# Altium PCB Copy of PCB_smart_home.PcbDoc
Units mil, origin at the board's own origin, x right, y up, seen from the top; angles counter-clockwise.
Board outline 3260 x 1750 mil, 2 copper layers (Top Layer, Bottom Layer); 23 components, 27 nets, 129 pads, 18 vias.
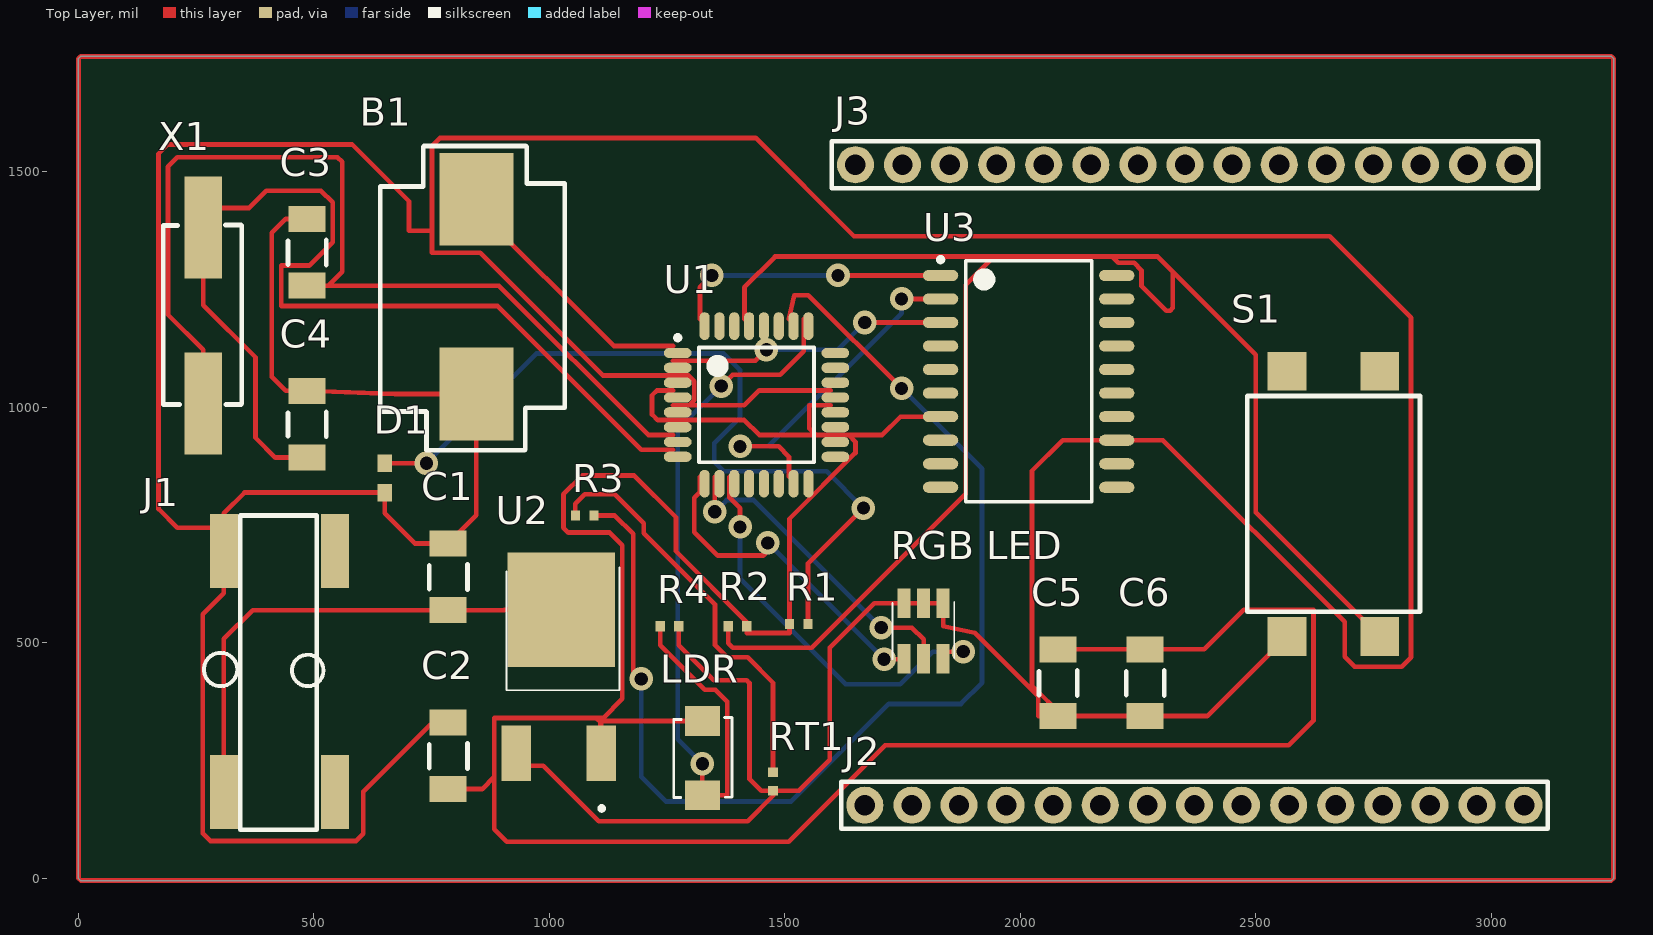
[diagram p0: Top Layer view]
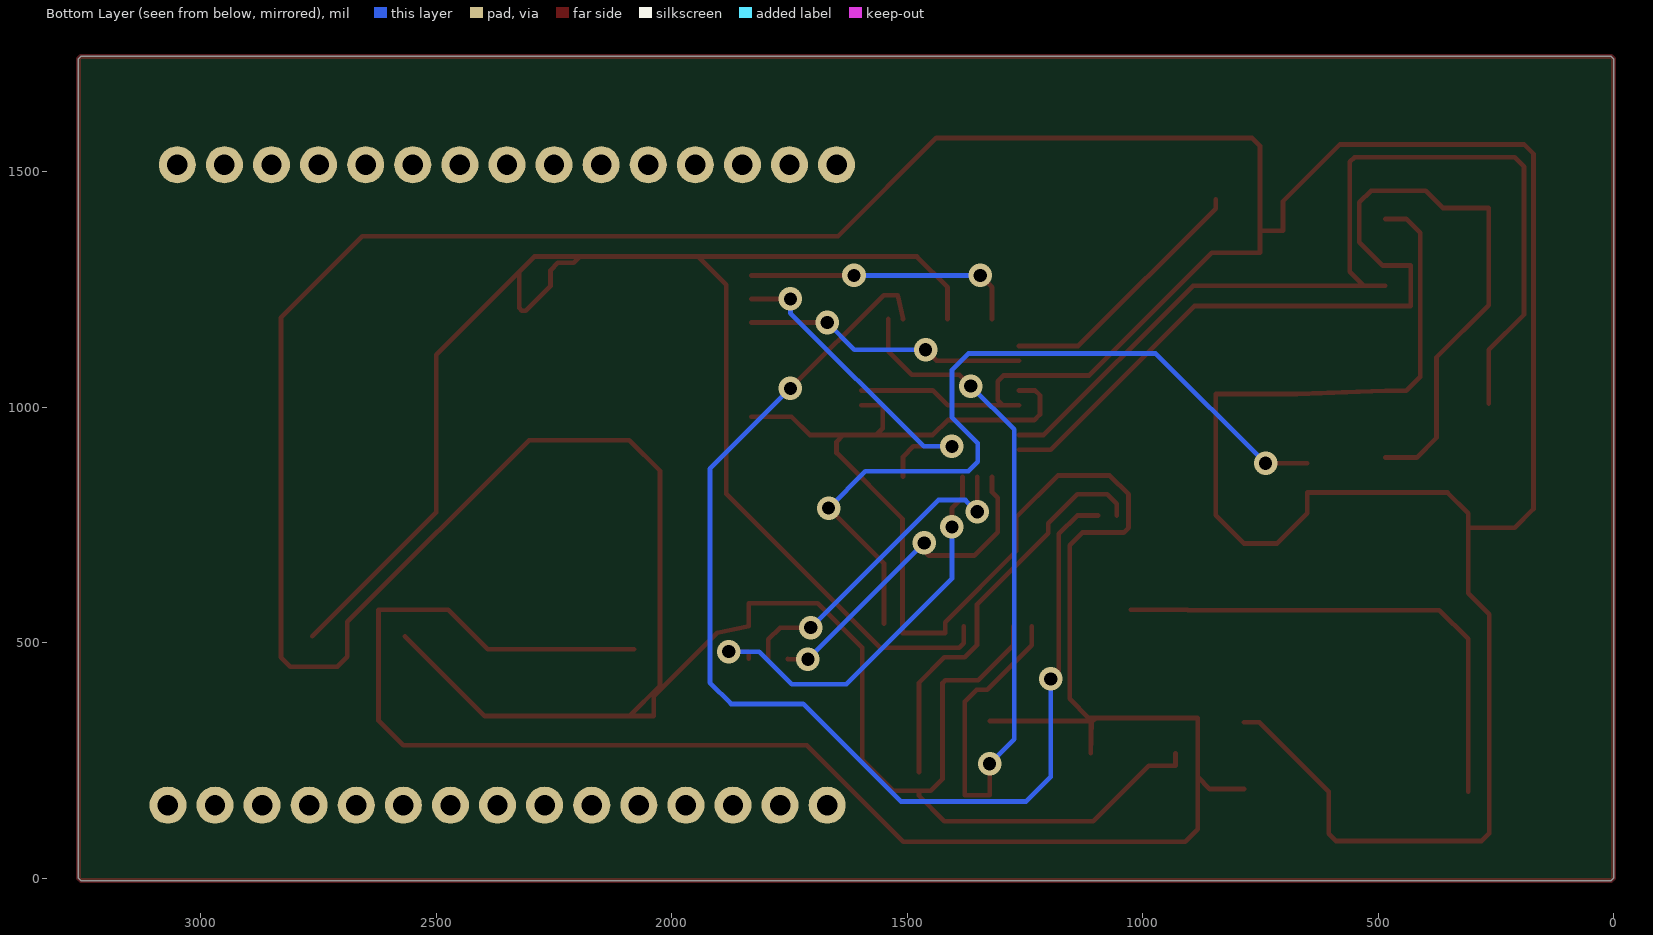
[diagram p1: Bottom Layer view, seen from below]

## Layer stack, top to bottom
Top Solder: solder mask 0.4, Solder Resist, Dk 3.5
Top Layer: signal copper 1.4
Dielectric 1: dielectric 12.6, FR-4, Dk 4.8
Bottom Layer: signal copper 1.4
Bottom Solder: solder mask 0.4, Solder Resist, Dk 3.5

## Board outline
0,0 5,-5 3255,-5 3260,0 3260,1740 3255,1745 5,1745 0,1740

## Design rules (kind name [scope] priority, off if disabled: settings)
Clearance [All] p1: gap=10 ignorepadtopadclearanceinfootprint=FALSE
PolygonConnect [All] p1: connectstyle=Relief reliefconductorwidth=10 reliefentries=4 polygonreliefangle="90 Angle" airgapwidth=10
RoutingVias [All] p1: holewidth=28 width=50 viastyle="Through Hole" minholewidth=28 minwidth=50 maxholewidth=28 maxwidth=50
SolderMaskExpansion [All] p1: expansion=4 istentingtop=FALSE
SupplyNets "Schematic Supply Nets_2" [InNet('+12')] p1: voltage=0.000
SupplyNets "Schematic Supply Nets_1" [InNet('GND')] p2: voltage=0.000
SupplyNets "Schematic Supply Nets" [InNet('+5')] p3: voltage=0.000
Width [All] p1: maxlimit=10 minlimit=10 preferedwidth=10
30 further rules are at their usual default settings.

## Components (designator, comment, footprint, x,y, rotation, side; value= is the part's Value field where it differs from the comment)
B1 "CMT-1271-88-SMT-TR" PCBComponent_1#1 845,1235 r0 top
C1 "0.33uF" PCBComponent_1#2 785,640 r90 top
C2 "0.1uF" PCBComponent_1#2 785,260 r90 top
C3 "22PF" PCBComponent_1#2 485,1329.13 r90 top
C4 "22PF" PCBComponent_1#2 485,964.13 r90 top
C5 "100nF" PCBComponent_1#2 2080,415 r90 top
C6 "100nF" PCBComponent_1#2 2265,415 r90 top
D1 "RED" PCBComponent_1#3 647.6,844.44 r180 top
J1 "PJ-002AH-SMT-TR" PCBComponent_1#4 426.89,439.09 r90 top
J2 "TSM-108-01-L-SV" Header 3070,155 r180 top
J3 "TSM-108-01-L-SV" Header 3050,1515 r180 top
LDR "RS1G" PCBComponent_1#5 1325,255 r0 top
R1 "330 Ω" RESC1005X04N 1529.68,540 r0 top
R2 "1K" RESC1005X04N 1399.68,535 r0 top
R3 "resistor SMD" RESC1005X04N 1075,770 r0 top
R4 "10k" RESC1005X04N 1255,535 r0 top
"RGB LED" "ASMB-TTF2-0B20B" PCBComponent_1#6 1795,525 r90 top
RT1 "10K" RESC1005X04N 1475,205.31 r90 top
S1 "TS16-1212-85-BK-100-SMT-TR" PCBComponent_1#7 2665,795 r90 top
U1 "ATMEGA8A-AU_C16190" TQFP80P900X900X120-32N 1440,1005 r0 top
U2 "MC78M05ACDTRKG" PCBComponent_1#8 1025,570 r270 top
U3 "Driver L293D" SOIC127P1030X265-20N 2017.99,1055 r0 top
X1 "16 MHZ" PCBComponent_1#9 265,1195 r90 top

## Footprints (in the part's own frame and the unit in brackets; to place one, negate y for a bottom-side part, rotate by r counter-clockwise, add the part's x,y. Pads: shape width x height; smd on the part's side, far side on the other; paste and mask are expansions set on the pad)
Header [mm] "SIL Header"
  round 2 hole 1.1: 1(0,0) 2(2.54,0) 3(5.08,0) 4(7.62,0) 5(10.16,0) 6(12.7,0) 7(15.24,0) 8(17.78,0) 9(20.32,0) 10(22.86,0) 11(25.4,0) 12(27.94,0) 13(30.48,0) 14(33.02,0) 15(35.56,0)
  silkscreen extent -1.27,-1.27 36.83,1.27, body extent -1.33,-1.35 36.93,1.35, height 8.6
PCBComponent_1#1 [mm]
  rect 4x5 smd: 1(0,5.25) 2(0,-5.25)
  silkscreen extent -5.18,-8.28 4.78,8.13, body extent -6.55,-6.82 6.25,7.08, height 7.15
PCBComponent_1#2 [mm]
  rect 1.4x2 smd: 1(-1.8,0) 2(1.8,0)
  silkscreen extent -0.69,-1.04 0.66,1.02, body extent -1.65,-1 1.55,0.8, height 1.6
PCBComponent_1#3 [mm]
  rect 0.79x0.94 smd: 1(-0.066,-0.931) 2(-0.066,0.649)
  body extent -0.43,-0.97 0.37,0.63, height 0.8
PCBComponent_1#4 [mm]
  rect 4x1.5 smd: 1(-6.5,3) 2(6.5,3) 3(6.5,-3) 4(-6.5,-3)
  silkscreen extent -8.53,-2.37 8.41,4.07, body extent -6.05,-6.93 6.55,7.97, height 11.01
PCBComponent_1#5 [mm]
  rect 1.9x1.6 smd: 1(0,2) 2(0,-2)
  silkscreen extent -1.55,-2.13 1.6,2.18, body extent -1.38,-2.54 1.18,2.6, height 2.58
PCBComponent_1#6 [mm]
  rect 1.6x0.7 smd: 1(-1.5,1.05) 2(1.5,1.05) 3(-1.5,0) 4(1.5,0) 5(-1.5,-1.05) 6(1.5,-1.05)
  silkscreen extent -1.52,-1.65 1.57,1.68, body extent -1.85,-1.72 1.85,1.78, height 2.8
PCBComponent_1#7 [mm]
  rect 2.1x2.1 smd: 1(-7.15,2.5) 2(-7.15,-2.5) 3(7.15,2.5) 4(7.15,-2.5)
  silkscreen extent -5.82,-4.67 5.82,4.65, body extent -7.6,-6.23 7.6,5.77, height 8.8
PCBComponent_1#8 [mm]
  rect 6.2x5.8 smd: 1(0,0)
  rect 3x1.6 smd: 2(7.747,2.159) 3(7.747,-2.411)
  silkscreen extent -2.29,-2.95 10.82,3.15, body extent -1.85,-3.3 8.05,3.2, height 2.59
PCBComponent_1#9 [mm]
  rect 5.5x2 smd: 1(-4.75,0) 2(4.75,0)
  silkscreen extent -4.8,-2.08 4.88,2.16, body extent -6.55,-2.33 6.65,2.47, height 4.31
RESC1005X04N [mm] "Chip Resistor, 2-Leads, Body 1.00x0.50mm, IPC Medium Density"
  rect 0.5x0.55 smd: 1(-0.5,0) 2(0.5,0)
  body extent -0.53,-0.28 0.53,0.28, height 0.4
SOIC127P1030X265-20N [mm] "SOIC, 20-Leads, Body 12.80x7.50mm, Pitch 1.27mm, IPC Medium Density"
  oval 1.9x0.6 smd: 1(-4.75,5.715) 2(-4.75,4.445) 3(-4.75,3.175) 4(-4.75,1.905) 5(-4.75,0.635) 6(-4.75,-0.635) 7(-4.75,-1.905) 8(-4.75,-3.175) 9(-4.75,-4.445) 10(-4.75,-5.715) 11(4.75,-5.715) 12(4.75,-4.445) 13(4.75,-3.175) 14(4.75,-1.905) 15(4.75,-0.635) 16(4.75,0.635) 17(4.75,1.905) 18(4.75,3.175) 19(4.75,4.445) 20(4.75,5.715)
  silkscreen extent -4.87,-6.5 3.4,6.69, body extent -5.16,-6.5 5.16,6.5, height 2.65
TQFP80P900X900X120-32N [mm] "TQFP, 32-Leads, Body 7.00x7.00mm, Pitch 0.80mm, IPC Medium Density"
  oval 1.5x0.55 smd: 1(-4.25,2.8) 2(-4.25,2) 3(-4.25,1.2) 4(-4.25,0.4) 5(-4.25,-0.4) 6(-4.25,-1.2) 7(-4.25,-2) 8(-4.25,-2.8) 17(4.25,-2.8) 18(4.25,-2) 19(4.25,-1.2) 20(4.25,-0.4) 21(4.25,0.4) 22(4.25,1.2) 23(4.25,2) 24(4.25,2.8)
  oval 0.55x1.5 smd: 9(-2.8,-4.25) 10(-2,-4.25) 11(-1.2,-4.25) 12(-0.4,-4.25) 13(0.4,-4.25) 14(1.2,-4.25) 15(2,-4.25) 16(2.8,-4.25) 25(2.8,4.25) 26(2,4.25) 27(1.2,4.25) 28(0.4,4.25) 29(-0.4,4.25) 30(-1.2,4.25) 31(-2,4.25) 32(-2.8,4.25)
  silkscreen extent -4.37,-3.1 3.1,3.75, body extent -4.5,-4.5 4.5,4.5, height 1.2

## Part data
B1: library part buzzer, "88dB Passive (external drive) Electromagnetic Type 2.4kHz Buzzers ROHS", manufactor=CUI, supplier part number=C3811771, ComponentLink1Description="snapeda link", ComponentLink1URL=https://www.snapeda.com/parts/CMT-1271-88-SMT-TR/CUI%20Devices/view-part/?ref=search&t=Buzzer%20smd, ComponentLink2Description=datasheet, ComponentLink2URL=https://www.snapeda.com/parts/CMT-1271-88-SMT-TR/CUI%20Devices/datasheet/, manufactor part number=CMT-1271-88-SMT-TR, supplier=LCSC
C1 C2 C3 C4 C5 C6: library part "capacitor_1206 CODE", "100V 100nF C0G ±5% 1206 Multilayer Ceramic Capacitors MLCC - SMD/SMT ROHS", manufactor="Murata Electronics", manufactor part number=GRM31C5C2A104JA01L, supplier part number=C405303, ComponentLink1Description="snapeda link", ComponentLink1URL=https://www.snapeda.com/parts/GRM31C5C2A104JA01L/Murata/view-part/?ref=search&t=1206%20cap%20smd, ComponentLink2Description=Datasheet, ComponentLink2URL=https://www.snapeda.com/parts/GRM31C5C2A104JA01L/Murata/datasheet/, supplier=LCSC
D1: library part LED, "Red,Emerald SMD,1.6x1.9mm LED Indication - Discrete ROHS", Manufacturer="Everlight Elec", Manufacturer part number=19-22/R6GHC-A32/2T, supplier part number=C131262, ComponentLink1Description=Datasheet, ComponentLink1URL=https://www.lcsc.com/datasheet/lcsc_datasheet_1811141149_Everlight-Elec-19-22-R6GHC-A32-2T_C131262.pdf, supplier=LCSC
J1: library part "DC connector", "SMD DC Power Connectors ROHS", Manufacturer=CUI, package=SMD, supplier part number=C22434687, ComponentLink1Description="snapeda link", ComponentLink1URL=https://www.snapeda.com/parts/PJ-002AH-SMT-TR/CUI%20Devices/view-part/?ref=search&t=DC%20connector%20SMD, ComponentLink2Description=datasheet, ComponentLink2URL=https://www.snapeda.com/parts/PJ-002AH-SMT-TR/CUI%20Devices/datasheet/, Manufacturer part number=PJ-002AH-SMT-TR, supplier=LCSC
J2 J3: package=None, Availability=Unavailable, MF=Samtec, MP=TSM-108-01-L-SV, Price=None
LDR: library part "LDR sensor", "1A Independent Type 1.3V@1A 400V SMA(DO-214AC) Diodes - General Purpose ROHS", manufactor="SMC(Sangdest Microelectronicstronic (Nanjing))", ComponentLink1Description=snapeda, ComponentLink1URL=https://www.snapeda.com/parts/RS1G/Taiwan%20Semiconductor/view-part/?ref=search&t=LDR%20sensor%20smd, ComponentLink2Description=datasheet, ComponentLink2URL=https://www.snapeda.com/parts/RS1G/Taiwan%20Semiconductor/datasheet/, manufactor part time=RS1G, supplier=LCSC, supplier part time=C260336
R1 R2 R3 R4: library part Resistor, "500mW Thick Film Resistors 400V ±100ppm/℃ ±1% 100Ω 1210 Chip Resistor - Surface Mount ROHS", Manufacturer=PANASONIC, Manufacturer part number=ERJ-U14F1000U, supplier part number=C1014086, ComponentLink1Description=Datasheet, ComponentLink1URL=https://www.lcsc.com/datasheet/lcsc_datasheet_2201131530_PANASONIC-ERJ-U14F1000U_C1014086.pdf, supplier=Lcsc
"RGB LED": library part "RGB LED", "PLCC-6 RGB LEDs ROHS", manufactor="Broadcom Limited", supplier part number=C6126294, ComponentLink1Description="snapeda link", ComponentLink1URL=https://www.snapeda.com/parts/ASMB-TTF2-0B20B/Broadcom%20%2F%20Avago/view-part/?ref=search&t=RGB%20led%20smd, ComponentLink2Description=datasheet, ComponentLink2URL=https://www.snapeda.com/parts/ASMB-TTF2-0B20B/Avago%20Technologies/datasheet/, ComponentLink3Description="LCSC link", ComponentLink3URL=https://www.lcsc.com/product-detail/RGB-LEDs_Broadcom-Limited-ASMB-TTF2-0B20B_C6126294.html, manufactor part number=ASMB-TTF2-0B20B, supplier=LCSC
RT1: library part "NTC temperature sensor", "10kΩ ±0.5% 3380K ±0.7% 0402 NTC Thermistors ROHS / Recommended For You", Manufacturer="Murata Electronics", Manufacturer part number=NCU15XH103D6SRC, supplier part number=C17294780, ComponentLink1Description=datasheet, ComponentLink1URL=https://www.lcsc.com/datasheet/lcsc_datasheet_2401291008_Murata-Electronics-NCU15XH103D6SRC_C17294780.pdf, supplier=lcsc
S1: library part switch, "50mA Standing paste SPST - normally open 100gf 12V Tactile Switches ROHS", manufactor=CUI, supplier part number=C6338790, ComponentLink1Description=snapeda, ComponentLink1URL=https://www.snapeda.com/parts/TS16-1212-85-BK-100-SMT-TR/CUI%20Devices/view-part/?ref=search&t=switch%20smd, ComponentLink2Description=datasheet, ComponentLink2URL=https://www.snapeda.com/parts/TS16-1212-85-BK-100-SMT-TR/CUI%20Devices/datasheet/, manufactor part time=TS16-1212-85-BK-100-SMT-TR, supplier=LCSC
U1: library part ATMEGA8A-AU, "8KB 1KB FLASH 23 2.7V~5.5V AVR 16MHz TQFP-32(7x7) Microcontrollers (MCU/MPU/SOC) ROHS", Manufacturer="Microchip Tech", supplier part number=C16190, ComponentLink1Description=Datasheet, ComponentLink1URL=https://www.lcsc.com/datasheet/lcsc_datasheet_1810161120_Microchip-Tech-ATMEGA8A-AU_C16190.pdf, Manufacturer part number=ATMEGA8A-AU, supplier=LCSC
U2: library part regulator, "500mA 80dB@(120Hz) Fixed 5V Positive electrode 35V TO-252-2(DPAK) Voltage Regulators - Linear, Low Drop Out (LDO) Regulators ROHS", Manufacturer=onsemi, supplier part number=C232660, ComponentLink1Description="snapeda link", ComponentLink1URL=https://www.snapeda.com/parts/MC78M05ACDTRKG/onsemi/view-part/?ref=search&t=regulator%205v%20smd, ComponentLink2Description=Datasheet, ComponentLink2URL=https://www.snapeda.com/parts/MC78M05ACDTRKG/onsemi/datasheet/, ComponentLink3Description="LCSC link", ComponentLink3URL=https://www.lcsc.com/product-detail/Voltage-Regulators-Linear-Low-Drop-Out-LDO-Regulators_onsemi-MC78M05ACDTRKG_C232660.html, Manufacturer part number=MC78M05ACDTRKG, supplier=LCSC
U3: "SOIC-20-300mil Stepper Motor Driver ROHS", Manufacturer=STMicroelectronics, Manufacturer part number=L293DD013TR, supplier part number=C21610, ComponentLink1Description=datasheet, ComponentLink1URL=https://www.lcsc.com/datasheet/lcsc_datasheet_2304140030_STMicroelectronics-L293DD013TR_C21610.pdf, supplier=LCSC
X1: library part crystal, "16MHz ±30ppm ±50ppm HC-49S-SMD Crystals ROHS", ComponentLink1Description="snapeda link", ComponentLink1URL=https://www.snapeda.com/parts/ECS-160-S-5P-TR/ECS%20International/view-part/?ref=search&t=16MHZ%20crystl, ComponentLink2Description=datasheet, ComponentLink2URL=https://www.lcsc.com/datasheet/lcsc_datasheet_2211020230_ECS-ECS-160-S-5P-TR_C2450888.pdf, ComponentLink3Description="LCSC link", ComponentLink3URL=https://www.lcsc.com/product-detail/Crystals_span-style-background-color-ff0-ECS-span-ECS-160-S-5P-TR_C2450888.html

## Via types
v1: diameter 50, hole 28, Top Layer to Bottom Layer, 18 vias

## Nets (pads, with @x,y where several pads share a name; then routed paths per layer and width w, separated by ;. In a path a pad name is that pad's centre, name@x,y a point inside that pad or via, vN(x,y) a via of type N, cw(c..) or ccw(c..) an arc to the next point about the centre after c; other vN are vias at no path point)
+5: C2.1 C5.2 C6.2 LDR.1 R1.1 R2.2 U1.4 U1.6 U1.18 U1.20 U2.2 U3.7 | length 6231.6
  Top Layer w10: C2.1 857.13,189.13 883,215 ; 1262.68,1035.75 1228.75,1035.75 1218,1025 1218,984.76 1230,972.76 1262.68,972.76 1414,972.76 1445.5,941.26 1565.74,941.26 ; LDR.1 1110,333.74 1108.13,331.87 ; 1597.32,1004.25 1552,1004.25 1552,955 1565.74,941.26 ; U3.7 1745.74,980 1707,941.26 1635.74,941.26 ; C5.2 C6.2 2391,485.87 2475.13,570 2623,570 2623,335 2570,282 1713,282 1508,77 910,77 883,104 883,215 ; 883,215 883,340 1100,340 ; 1100,340 1114,340 1155,381 1155,707 1128,734 1040,734 1030,744 1030,815 1070,855 1180,855 1269,766 1269,694 1419.37,543.63 R2.2 1419.37,520.49 1510,520.49 R1.1 1510,763 1650,903 1650,927 1635.74,941.26 ; 1100,340 1108.13,331.87 ; 1108.13,331.87 1110,330 U2.2 1108.13,331.87 ; 1565.74,941.26 1597.32,941.26 1635.74,941.26
+12: U3.6
BLUE: "RGB LED.5" U1.11 | length 878.9
  Top Layer w10: U1.11@1382.76,852.68 1382.76,808 1405,785.76 v1(1405,746) ; 1836.34,465.94 1836.34,481 v1(1879,481)
  Bottom Layer w10: v1(1405,746) 1405,636.09 1629.09,412 1745,412 1814,481 v1(1879,481)
BUZZER: B1.1 U1.1 | length 558.2
  Top Layer w10: B1.1 845,1422 1136.76,1130.24 1262.68,1130.24
EN1: U1.15 U3.2 | length 728.4
  Top Layer w10: v1(1405,917) 1486.74,917 1508.74,895 U1.15@1508.74,852.68 ; v1(1748,1230) U3.2
  Bottom Layer w10: v1(1405,917) 1465,917 1748,1200 v1(1748,1230)
GND: "RGB LED.2" "RGB LED.4" "RGB LED.6" B1.2 C1.2 C2.2 C3.2 C4.2 C5.1 C6.1 D1.2 J1.2 R4.2 RT1.1 S1.1 U1.3 U1.5 U1.21 U2.3 U3.13 | length 13391.8
  Top Layer w10: C3.2 440,1400 410.63,1370.63 410.63,1064.37 440,1035 C4.2 671.69,1028.31 B1.2 845,770.87 C1.2 714.33,710.87 650.19,775 D1.2 352.66,818.88 308.78,775 J1.2@308.78,744 ; C2.2 752,330.87 605,183.87 605,94 590,79 280,79 264,95 264,560.22 308.78,605 J1.2 J1.2@308.78,744 ; U2.3 930.08,239 987,239 1105,121 1421,121 1475,175 RT1.1 ; 1262.68,1004.25 1297.25,1004.25 ; R4.2 1274.69,495 1349.45,420.24 1419.08,420.24 1425,414.32 1425,210.63 1450,185.63 RT1.1 ; 1597.32,1035.75 1445.5,1035.75 1414,1004.25 1297.25,1004.25 ; S1.1 2397.21,344.13 C6.1 2172,344.13 C5.1@2090,344.13 ; J1.2@308.78,744 210,744 170,784 170,1538 190,1558 581,1558 702,1437 702,1375 751,1375 ; 751,1375 751,1555 768,1572 1438,1572 1647,1363 2657,1363 2830,1190 2830,469 2810,449 2710,449 2689,470 2689,544 2303,930 U3.13 2090,930 2025,865 2025,409.13 C5.1@2090,344.13 ; 751,1375 751,1328 853.24,1328 1114,1067.24 1262.68,1067.24 1295.76,1067.24 1308,1055 1308,1015 1297.25,1004.25 ; RT1.1 1530,185.63 1595.63,251.26 1595.63,489.68 1690,584.06 1753.66,584.06 1795,584.06 1836.34,584.06 1836.34,534.66 1903,521 2038.07,385.93 2038.07,344.13 C5.1 C5.1@2090,344.13
GREEN: "RGB LED.3" U1.10 | length 692.4
  Top Layer w10: v1(1351.26,778) U1.10@1351.26,852.68 ; v1(1705,532) 1770,532 1795,507 1795,465.94
  Bottom Layer w10: v1(1351.26,778) 1376.26,803 1434,803 v1(1705,532)
IN1: U1.32 U3.1 | length 589.1
  Top Layer w10: U1.32@1319.76,1187.32 1319.76,1254.76 v1(1345,1280) ; v1(1613,1280) U3.1
  Bottom Layer w10: v1(1345,1280) v1(1613,1280)
IN2: U1.2 U3.3 | length 602
  Top Layer w10: 1262.68,1098.74 1437.74,1098.74 v1(1461,1122) ; v1(1670,1180) U3.3
  Bottom Layer w10: v1(1461,1122) 1612,1122 v1(1670,1180)
KEYPAD: U1.23
LDR: LDR.2 R4.1 U1.25 | length 1686.6
  Top Layer w10: R4.1 1235.32,495 1330.08,400.24 1352.76,400.24 1378,375 1378,176.26 LDR.2 v1(1325,243) ; v1(1365,1045) 1389,1069 1490,1069 1540.24,1119.24 U1.25@1540.24,1187.32
  Bottom Layer w10: v1(1325,243) 1273,295 1273,953 v1(1365,1045)
MISO: U1.16
MOTOR1: U3.9
MOTOR2: U3.10
NetC1_1: C1.1 J1.1 U2.1 | length 1066.7
  Top Layer w10: J1.1 308.78,507.91 370,569.13 C1.1 904,569.13 904.87,570 U2.1
NetD1_1: D1.1 R1.2 | length 1735.9
  Top Layer w10: D1.1 v1(739.09,881.09) ; R1.2 1549.37,668.37 v1(1667,786)
  Bottom Layer w10: v1(739.09,881.09) 972,1114 1370,1114 1405,1079 1405,979 1350,924 1350,884 1370,864 1589,864 v1(1667,786)
NetR3_1: R3.1 RT1.2 | length 871.5
  Top Layer w10: R3.1 1055.32,795 1075.32,815 1139.13,815 1200.63,753.5 1200.63,732.37 1351.91,581.09 1351.91,495 1377.91,469 1421,469 1475,415 RT1.2
NTC: R3.2 U1.26 | length 2530.2
  Top Layer w10: R3.2 1138.98,770 1178.05,730.93 1178.05,439.95 v1(1195,423) ; U1.26@1508.74,1187.32 1520,1238 1550,1238 v1(1748,1040)
  Bottom Layer w10: v1(1195,423) 1195,215 1247,163 1514,163 1721,370 1874,370 1919,415 1919,869 v1(1748,1040)
PIR: U1.27
RED: "RGB LED.1" U1.9 | length 713.6
  Top Layer w10: U1.9@1319.76,852.68 1319.76,820 1307.83,808.06 1307.83,735 1357.83,685 1454,685 1464,695 v1(1464,712) ; v1(1711,465) 1753.66,465 1753.66,465.94
  Bottom Layer w10: v1(1464,712) v1(1711,465)
RESET: R2.1 S1.2 U1.29 | length 3458.2
  Top Layer w10: R2.1 1380,499 1390,489 1557,489 1884,816 1884,1260 1944,1320 ; U1.29@1414.25,1187.32 1414.25,1255 1479.25,1320 1944,1320 ; S1.2 2500.27,776.66 2500.27,1111.73 2324,1288 ; 1944,1320 2195,1320 ; 2195,1320 2208.19,1306.81 2241.7,1306.81 2257.4,1291.11 2257.4,1257.6 2309.86,1205.14 2318.14,1205.14 2324,1211 2324,1288 ; 2195,1320 2292,1320 2324,1288
RX: U1.30
SCK: U1.17
SERVO: U1.13
TX: U1.31
XTAL1: C3.1 U1.7 X1.1 | length 2100.6
  Top Layer w10: X1.1 265,1122 190,1197 190,1511 210,1531 550,1531 560,1521 560,1288.27 530,1258.27 ; C3.1 530,1258.27 ; 1262.68,941.26 1210,941.26 892.99,1258.27 530,1258.27
XTAL2: C4.1 U1.8 X1.2 | length 2219.5
  Top Layer w10: C4.1 417.73,893.27 376,935 376,1106 265,1217 X1.2 265,1423 362,1423 399,1460 515,1460 540,1435 540,1350.83 490,1300.83 430.63,1300.83 430.63,1215 890.41,1215 1195.65,909.76 1262.68,909.76
pads on no net: J1.3 J1.4 J2.1 J2.2 J2.3 J2.4 J2.5 J2.6 J2.7 J2.8 J2.9 J2.10 J2.11 J2.12 J2.13 J2.14 J2.15 J3.1 J3.2 J3.3 J3.4 J3.5 J3.6 J3.7 J3.8 J3.9 J3.10 J3.11 J3.12 J3.13 J3.14 J3.15 S1.3 S1.4 U1.12 U1.14 U1.19 U1.22 U1.24 U1.28 U3.4 U3.5 U3.8 U3.11 U3.12 U3.14 U3.15 U3.16 U3.17 U3.18 U3.19 U3.20
copper on no net: | length 10008.3
  Top Layer w10: 0,0 5,-5 3255,-5 3260,0 3260,1740 3255,1745 40,1745 5,1745 0,1740 0,0